# Altium PCB INVERTER_Logic_noCutout.pcbdoc (part 2 of 2)
Units mil, origin at the board's own origin, x right, y up, seen from the top; angles counter-clockwise.
Board outline 4675.98 x 2297.64 mil, 2 copper layers (Top Layer, Bottom Layer), stack 64.567 mil thick; 154 components, 177 nets, 511 pads, 163 vias.
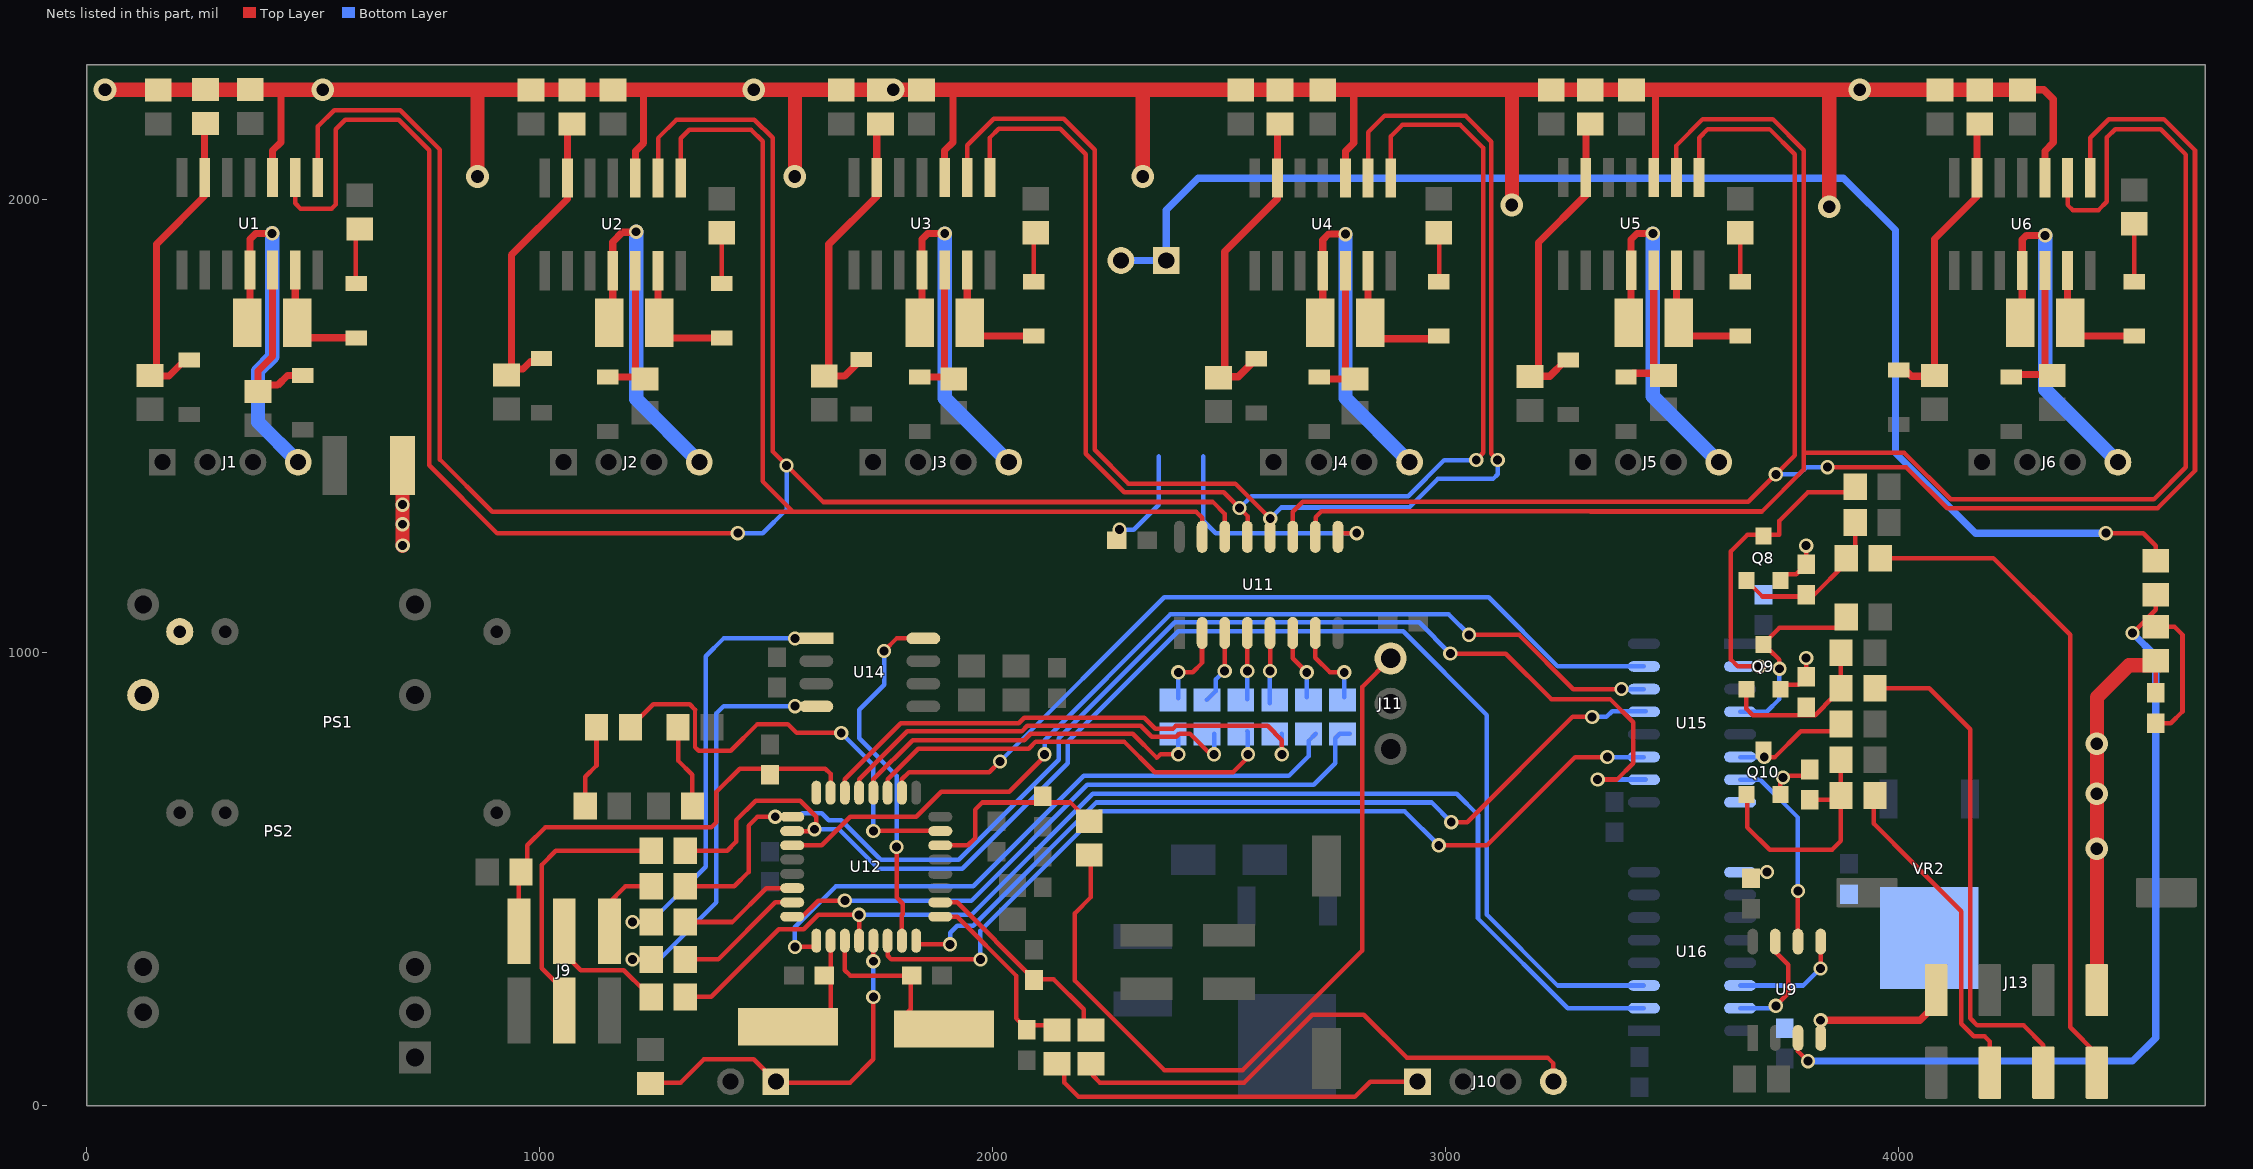
[diagram p2: the nets of this part, all layers, seen from the top]

## Via types
v1: diameter 31.5, hole 19.68, Top Layer to Bottom Layer, 136 vias
v2: diameter 50, hole 28, Top Layer to Bottom Layer, 27 vias

## Nets (pads, with @x,y where several pads share a name; then routed paths per layer and width w, separated by ;. In a path a pad name is that pad's centre, name@x,y a point inside that pad or via, vN(x,y) a via of type N, cw(c..) or ccw(c..) an arc to the next point about the centre after c; other vN are vias at no path point) (continued)
GND_HV: C1.1 C3.1 C5.1 C7.1 C9.1 C11.1 C20.2 C31.1 C59.2 C60.1 C61.1 C62.1 C63.1 C64.1 C65.2 C66.1 J13.1 J13.4 PS1.8 PS2.16 Q8.2 Q9.2 Q10.2 R4.2 R8.2 R12.2 R16.2 R20.2 R24.2 R25.2 R26.2 R27.2 R28.2 R29.2 R30.2 R81.1 U1.3 U2.3 U3.3 U4.3 U5.3 U6.3 U9.4 U11.9 U15.8 U16.9 VR2.4 | length 9035.7
  Top Layer w10: v1(2279.53,1271.65) 2285.43,1265.75 C31.1@2285.43,1236.22 ; U11.9@2761.81,1255.91 2769.69,1263.78 v1(2803.15,1263.78) ; C59.2@3673.23,515.75 v1(3708.66,515.75) ; Q9.2@3736.22,929.13 3777.56,929.13 C61.1@3795.28,946.85 v1(3795.28,988.19) ; Q10.2@3738.19,687.01 3738.19,718.5 3748.03,728.35 C60.1@3811.02,728.35 ; Q8.2@3740.16,1173.23 3773.62,1173.23 C62.1@3795.28,1194.88 v1(3795.28,1236.22) ; U9.4@3827.17,149.61 v1(3827.17,188.58) ; C66.1@4566.93,911.42 R81.1@4566.93,982.28
  Top Layer w15.75: U1.3@410.04,2049.21 410.04,2108.46 428.35,2126.77 428.35,2242.91 ; U2.3@1210.83,2047.64 1210.83,2106.89 1229.13,2125.2 1229.13,2242.91 ; U3.3@1893.5,2049.21 1893.5,2108.46 1911.81,2126.77 1911.81,2242.91 ; U4.3@2778.15,2047.64 2778.15,2106.89 2796.46,2125.2 2796.46,2242.91 ; U5.3@3462.8,2048.82 3462.8,2238.58 ; v1(3827.17,188.58) 4046.85,188.58 J13.1@4078.74,220.47 ; R24.2@4272.83,2242.52 4319.68,2242.52 4340.55,2221.65 4340.55,2125.98 4322.24,2107.68 U6.3@4322.24,2048.43
  Top Layer w31.5: v2@39.37,2242.52 862.2,2242.52 ; v1@696.85,1236.22 C20.2@696.85,1374.02 ; v2(862.2,2051.18) 862.2,2242.52 ; v2(1562.99,2051.18) 1562.99,2240.16 ; v2(2330.71,2051.18) 2330.71,2236.22 ; v2(3145.67,1988.19) 3145.67,2238.58 ; v2(3846.46,1984.25) 3846.46,2242.52 ; R24.2@4272.83,2242.52 862.2,2242.52 ; J13.4@4437.01,255.12 4437.01,901.57 4507.87,972.44 R81.1@4574.8,972.44
  Bottom Layer w10: v1(2279.53,1271.65) 2311.02,1271.65 2366.14,1326.77 2366.14,1433.07 ; 2464.57,1433.07 2464.57,1291.34 2492.13,1263.78 v1(2803.15,1263.78)
  other v1: 3744.09,724.41 697.24,1236.61 696.85,1283.46 696.85,1326.77
  other v2: 4437.01,566.93 4437.01,688.98 4437.01,799.21 40.16,2242.52 520.47,2242.52 1472.44,2242.52 1780.32,2242.52 3913.39,2242.52
H_in_A: 
H_in_B: 
H_in_C: 
H_in_D: 
H_in_E: 
H_in_F: 
H_in_U: U1.1 U2.1 U11.15 | length 4287
  Top Layer w10: U1.1@510.04,2049.21 510.04,2161.61 546.06,2197.64 692.13,2197.64 779.53,2110.24 779.53,1426.3 894.8,1311.02 1818.19,1311.02 ; U2.1@1310.83,2047.64 1310.83,2135.63 1329.92,2154.72 1466.14,2154.72 1492.13,2128.74 1492.13,1377.95 1558.66,1311.42 2448.43,1311.42 2461.81,1298.03 U11.15@2461.81,1255.91
H_in_V: U3.1 U4.1 U11.13 | length 3041.4
  Top Layer w10: U3.1@1993.5,2049.21 1993.5,2137.2 2012.6,2156.3 2148.82,2156.3 2204.72,2100.39 2204.72,1439.32 2290.11,1353.94 2509.84,1353.94 2562.2,1301.57 U11.13@2562.2,1255.91 ; U4.1@2878.15,2047.64 2878.15,2139.57 2903.54,2164.96 3031.89,2164.96 3082.68,2114.17 3082.68,1441.73 3066.93,1425.98 v1(3066.93,1425.2)
  Bottom Layer w10: v1(2544.49,1319.29) 2570.87,1345.67 2916.54,1345.67 2996.06,1425.2 v1(3066.93,1425.2)
H_in_W: U5.1 U6.1 U11.11 | length 4289
  Top Layer w10: U11.11@2662.2,1251.97 2662.2,1311.02 2684.25,1333.07 3667.72,1333.07 3770.08,1435.43 3770.08,2100 3714.17,2155.91 3577.95,2155.91 3558.86,2136.81 U5.1@3558.86,2048.82 ; v1(3842.52,1409.45) 4015.75,1409.45 4106.3,1318.9 4570.87,1318.9 4653.54,1401.57 4653.54,2109.06 4585.04,2177.56 4463.39,2177.56 4422.24,2136.42 U6.1@4422.24,2048.43
  Bottom Layer w10: v1(3728.35,1393.7) 3779.53,1393.7 3795.28,1409.45 v1(3842.52,1409.45)
H_out_A: D2.1 R2.2 U1.12 | length 372.3
  Top Layer w15.75: U1.12@410.04,1844.49 410.04,1654.13 377.95,1622.05 377.95,1594.49 381.89,1590.55 421.26,1590.55 442.91,1612.2 D2.1@476.38,1612.2
H_out_B: D5.1 R6.2 U2.12 | length 305.5
  Top Layer w15.75: D5.1@1149.61,1608.27 R6.2@1210.63,1608.27 ; R6.2@1210.83,1598.43 U2.12@1210.83,1842.91
H_out_C: D8.1 R10.2 U3.12 | length 318.9
  Top Layer w15.75: D8.1@1838.58,1608.27 R10.2@1903.54,1608.27 ; R10.2@1893.5,1590.55 U3.12@1893.5,1844.49
H_out_D: D11.1 R14.2 U4.12 | length 343.3
  Top Layer w15.75: D11.1@2731.89,1615.75 2720.47,1604.33 R14.2@2799.21,1604.33 ; R14.2@2778.15,1594.49 U4.12@2778.15,1842.91
H_out_E: D14.1 R18.2 U5.12 | length 273.4
  Top Layer w15.75: D14.1@3412.6,1616.93 3458.86,1616.93 U5.12@3458.86,1844.09
H_out_F: D17.1 R22.2 U6.12 | length 295.9
  Top Layer w15.75: D17.1@4255.91,1614.17 R22.2@4314.37,1614.17 ; R22.2@4322.24,1606.3 U6.12@4322.24,1843.7
hall_1: J13.8 R88.1 | length 1462.7
  Top Layer w10: R88.1@3976.38,1208.66 4208.66,1208.66 4377.95,1039.37 4377.95,173.23 4437.01,114.17 J13.8@4437.01,72.83
hall_2: J13.7 R85.1 | length 1132.8
  Top Layer w10: R85.1@3946.85,921.26 4066.93,921.26 4157.48,830.71 4157.48,192.91 4173.23,177.17 4275.59,177.17 4318.9,133.86 J13.7@4318.9,72.83
hall_3: J13.6 R83.1 | length 732
  Top Layer w10: R83.1@3944.88,685.04 3944.88,622.05 4031.5,535.43 4137.8,429.13 4137.8,181.1 4165.35,153.54 4188.98,153.54 4200.79,141.73 J13.6@4200.79,72.83
hall_5v: 
hall_gnd: 
Hall_Link1: C62.2 Q8.1 R88.2 R89.2 | length 342.9
  Top Layer w10: Q8.1@3663.39,1159.45 3698.82,1124.02 3809.06,1124.02 R88.2@3883.86,1198.82 ; R88.2@3903.54,1210.63 R89.2@3903.54,1287.4
Hall_Link2: C61.2 Q9.1 R85.2 R86.2 | length 339.8
  Top Layer w10: Q9.1@3663.39,919.29 3663.39,875.98 3677.17,862.2 3814.96,862.2 R85.2@3856.3,903.54 ; R85.2@3872.05,919.29 R86.2@3872.05,1000
Hall_Link3: C60.2 Q10.1 R82.2 R83.2 | length 544.3
  Top Layer w10: Q10.1@3665.35,687.01 3665.35,614.17 3714.57,564.96 3852.36,564.96 3872.05,584.65 R82.2@3872.05,763.78 ; C60.2@3803.15,675.2 R83.2@3860.24,675.2
HV_DIV: C66.2 R80.1 R81.2 U9.3 | length 2175.3
  Top Layer w10: U9.3@3777.17,149.61 3777.17,120.47 v1(3799.21,98.43) ; v1(4515.75,1043.31) 4566.93,1094.49 R80.1@4566.93,1127.95 ; C66.2@4566.93,844.49 4600.39,844.49 4625.98,870.08 4625.98,1039.37 4608.27,1057.09 R81.2@4566.93,1057.09
  Bottom Layer w15.75: v1(3799.21,98.43) 4515.75,98.43 4566.93,149.61 4566.93,992.13 v1(4515.75,1043.31)
HV_NEG: 
HV_POS: J7.1 J7.2 R80.2 | length 3072.5
  Top Layer w10: v1(4456.69,1263.78) 4539.37,1263.78 4566.93,1236.22 R80.2@4566.93,1202.76
  Bottom Layer w15.75: J7.2@2282.68,1865.75 2365.75,1865.75 2382.68,1882.68 2382.68,1977.17 2452.76,2047.24 3877.95,2047.24 3992.13,1933.07 3992.13,1440.94 4169.29,1263.78 v1(4456.69,1263.78)
HV_SHUNT: 
INT0: U12.14 U15.11 | length 2013.6
  Top Layer w10: U12.14@1767.72,364.17 1767.72,330.71 1775.59,322.83 v1(1972.44,322.83) ; v1(2984.25,574.8) 3090.55,574.8 3285.43,769.69 v1(3356.3,769.69)
  Bottom Layer w10: 1972.44,346.46 v1(1972.44,322.83) 1972.44,385.83 2236.22,649.61 2909.45,649.61 v1(2984.25,574.8) ; v1(3356.3,769.69) U15.11@3437.01,769.69
INT0_HV: Q10.3 R84.2 U15.6 | length 236.2
  Top Layer w10: v1(3702.76,769.69) 3726.38,769.69 3783.46,826.77 R84.2@3862.2,826.77
  Bottom Layer w10: U15.6@3649.61,769.69 v1(3702.76,769.69)
INT0_link: 
INT1: U12.16 U15.13 | length 1878.2
  Top Layer w10: U12.16@1826.77,356.3 v1(1905.51,356.3) ; v1(3011.81,625.98) 3047.24,625.98 3279.53,858.27 v1(3322.83,858.27)
  Bottom Layer w10: v1(1905.51,356.3) 1905.51,381.89 1921.26,397.64 1956.69,397.64 2228.35,669.29 2968.5,669.29 v1(3011.81,625.98) ; v1(3322.83,858.27) 3354.33,858.27 3366.93,870.87 U15.13@3440.94,870.87
INT1_HV: Q9.3 R87.2 U15.4 | length 416.3
  Top Layer w10: Q9.3@3704.72,1023.62 3736.22,1055.12 R87.2@3889.76,1055.12 ; Q9.3@3712.6,1007.87 3736.22,984.25 v1(3736.22,964.57)
  Bottom Layer w10: U15.4@3649.61,869.69 3708.27,869.69 3736.22,897.64 v1(3736.22,964.57)
INT1_link: 
INT2: U12.26 U15.15 | length 1896.8
  Top Layer w10: U12.26@1799.21,690.95 1799.21,720.47 1814.96,736.22 1992.13,736.22 v1(2015.75,759.84)
  Bottom Layer w10: v1(2015.75,759.84) 2377.95,1122.05 3094.49,1122.05 3246.85,969.69 U15.15@3437.01,969.69
INT2_HV: Q8.3 R90.2 U15.2 | length 694.6
  Top Layer w10: v1(3691.73,969.69) 3644.49,969.69 3629.25,984.92 3629.25,1223.74 3665.35,1259.84 3736.22,1259.84 3736.22,1291.34 3799.21,1354.33 R90.2@3901.57,1354.33
  Bottom Layer w10: U15.2@3649.61,969.69 v1(3691.73,969.69)
INT2_link: 
L_in_A: 
L_in_B: 
L_in_C: D9.2 R11.1 | length 119.5
  Top Layer w10: D9.2@2090.55,1818.9 2090.55,1913.39 R11.1@2108.27,1931.1
L_in_D: 
L_in_E: 
L_in_F: 
L_in_U: U1.2 U2.2 U11.14 | length 4402.9
  Top Layer w10: U1.2@460.04,2049.21 460.04,1991.93 471.65,1980.31 540.16,1980.31 549.21,1989.37 549.21,2155.51 570.08,2176.38 688.66,2176.38 755.91,2109.14 755.91,1413.39 905.51,1263.78 v1(1437.01,1263.78) ; U2.2@1260.83,2047.64 1260.83,2136.02 1301.57,2176.77 1473.62,2176.77 1513.78,2136.61 1513.78,1444.09 1625.2,1332.68 2485.83,1332.68 2512.2,1306.3 U11.14@2512.2,1255.91
  Bottom Layer w10: v1(1437.01,1263.78) 1492.13,1263.78 1544.49,1316.14 v1(1544.49,1413.39)
L_in_V: U3.2 U4.2 U11.12 | length 3251.4
  Top Layer w10: U3.2@1943.5,2049.21 1943.5,2119.88 2001.97,2178.35 2156.3,2178.35 2224.8,2109.84 2224.8,1447.64 2299.09,1373.35 2534.92,1373.35 v1(2612.2,1296.06) U11.12@2612.2,1255.91 ; U4.2@2828.15,2047.64 2828.15,2148.62 2864.57,2185.04 3043.31,2185.04 3100.16,2128.19 3100.16,1439.21 v1(3114.17,1425.2)
  Bottom Layer w10: v1(2612.2,1296.06) 2636.61,1320.47 2874.49,1320.47 2874.65,1320.63 2919.06,1320.63 2981.89,1383.46 3103.94,1383.46 3114.17,1393.7 v1(3114.17,1425.2)
L_in_W: U5.2 U6.2 U11.10 | length 4768.7
  Top Layer w10: U11.10@2712.2,1251.97 2712.2,1299.21 2724.8,1311.81 3697.64,1311.81 3790.16,1404.33 3790.16,1440.94 ; 3318.79,1311.02 3697.64,1311.02 ; U5.2@3508.86,2048.82 3508.86,2119.49 3567.32,2177.95 3721.65,2177.95 3790.16,2109.45 3790.16,1440.94 ; U6.2@4372.24,2048.43 4372.24,1988.39 4383.46,1977.17 4440.55,1977.17 4459.06,1995.67 4459.06,2137.4 4477.17,2155.51 4577.56,2155.51 4633.46,2099.61 4633.46,1409.06 4562.99,1338.58 4114.17,1338.58 4011.81,1440.94 3790.16,1440.94
L_out_A: D1.1 R1.1 R30.1 U1.6 | length 694.2
  Top Layer w15.75: D1.1@235.04,1644.09 214.57,1644.09 181.1,1610.63 153.54,1610.63 153.54,1901.57 260.04,2008.07 R30.1@260.04,2165.35
L_out_B: D4.1 R5.1 R29.1 U2.6 | length 712.8
  Top Layer w15.75: D4.1@990.55,1642.52 979.13,1642.52 962.6,1625.98 937.01,1625.98 920.08,1609.06 937.01,1609.06 937.01,1877.95 1060.83,2001.77 R29.1@1060.83,2169.29
L_out_C: D7.1 R9.1 R28.1 U3.6 | length 702.5
  Top Layer w15.75: D7.1@1718.5,1644.09 1706.3,1644.09 1672.84,1610.63 1628.35,1610.63 1637.8,1620.08 1637.8,1901.57 1743.5,2007.28 R28.1@1743.5,2161.42
L_out_D: D10.1 R13.1 R25.1 U4.6 | length 691.8
  Top Layer w15.75: D10.1@2581.5,1648.82 2541.73,1609.06 2511.81,1609.06 2511.81,1885.83 2628.15,2002.17 R25.1@2628.15,2166.53
L_out_E: D13.1 R17.1 R26.1 U5.6 | length 687.3
  Top Layer w15.75: D13.1@3283.86,1643.7 3262.6,1643.7 3229.13,1610.24 3204.72,1610.24 3204.72,1905.51 3308.86,2009.65 R26.1@3308.86,2161.42
L_out_F: D16.1 R21.1 R27.1 U6.6 | length 678.9
  Top Layer w15.75: D16.1@4011.81,1625.98 4027.56,1610.24 4090.16,1610.24 4089.76,1609.84 4078.74,1609.84 4078.74,1913.39 4172.24,2006.89 R27.1@4172.24,2153.54
LED1: D21.2@1199.84,835.47 U12.23 | length 1003.9
  Top Layer w7.87: 1342.52,791.34 1342.52,874.02
  Top Layer w10: D21.2@1199.84,835.47 1250.2,885.83 1330.71,885.83 1342.52,874.02 ; 1342.52,791.34 1350.39,783.46 1421.26,783.46 1480.31,842.52 1547.24,842.52 1566.93,822.83 v1(1665.35,822.83) ; v1(1736.22,606.3) 1736.89,606.97 1883.19,606.97 U12.23@1883.86,606.3
  Bottom Layer w10: v1(1665.35,822.83) 1736.22,751.97 1736.22,649.61 v1(1736.22,606.3)
LED_link_1: D21.1@1125.04,835.47 R50.1 | length 184.3
  Top Layer w10: R50.1@1100.39,661.42 1100.39,726.38 1125.04,751.02 D21.1@1125.04,835.47
LED_link_2: D22.1 R62.1 | length 187.1
  Top Layer w10: D22.1@1305.04,835.47 1305.04,761.89 1336.61,730.31 R62.1@1336.61,661.42
LINK_A: D3.2 R3.1 | length 113.8
  Top Layer w10: D3.2@593.31,1819.29 R3.1@593.31,1933.07
LINK_B: D6.2 R7.1 | length 112.2
  Top Layer w10: D6.2@1401.57,1814.96 R7.1@1401.57,1927.16
LINK_C: 
LINK_D: D12.2 R15.1 | length 114.6
  Top Layer w10: D12.2@2985.04,1814.96 R15.1@2985.04,1929.53
LINK_E: D15.2 R19.1 | length 114.6
  Top Layer w10: D15.2@3650,1816.14 R19.1@3650,1930.71
LINK_F: D18.2 R23.1 | length 128
  Top Layer w10: D18.2@4519.69,1818.9 R23.1@4519.69,1946.85
MISO: R64.1 U12.1 U15.10 | length 2925.2
  Top Layer w10: R64.1@1320.87,484.25 1429.13,484.25 1460.63,515.75 1460.63,618.11 1480.31,637.8 U12.1@1557.09,637.8 ; v1(3009.84,998.03) 3131.89,998.03 3232.28,897.64 3362.2,897.64 3413.39,846.46 3413.39,755.91 3377.56,720.08 v1(3335.04,720.08)
  Bottom Layer w10: v1(1519.68,637.8) 1570.87,637.8 1578.74,645.67 1622.05,645.67 1637.8,629.92 1665.35,629.92 1752.64,542.64 1924.53,542.64 2145.67,763.78 2145.67,811.02 2401.57,1066.93 2940.94,1066.93 v1(3009.84,998.03) ; v1(3335.04,720.08) U15.10@3440.94,720.08
MISO_HV: U9.6 U15.7 | length 436.1
  Top Layer w10: U9.6@3777.17,362.2 v1(3777.17,474.02)
  Bottom Layer w10: U15.7@3649.61,719.69 3693.7,719.69 3777.17,636.22 v1(3777.17,474.02)
MISO_link: J9.1 R64.2 | length 112.8
  Top Layer w10: J9.1@1149.61,444.88 1188.98,484.25 R64.2@1246.06,484.25
MOSI: R67.1 U12.2 U16.3 | length 3155.8
  Top Layer w10: R67.1@1320.87,562.99 1413.39,562.99 1433.07,582.68 1433.07,629.92 1476.38,673.23 1574.8,673.23 1610.24,637.8 1610.24,606.3 U12.2@1557.09,606.3
  Bottom Layer w10: v1(1606.3,610.24) 1660.32,610.24 1747.48,523.07 1932.52,523.07 2165.35,755.91 2165.35,803.15 2409.45,1047.24 2905.51,1047.24 3090.55,862.2 3090.55,421.26 3246.46,265.35 U16.3@3437.01,265.35
MOSI_HV: U9.5 U16.14 | length 252
  Top Layer w10: v1(3826.77,303.15) 3827.17,303.54 U9.5@3827.17,362.2
  Bottom Layer w10: U16.14@3649.61,265.35 3788.98,265.35 v1(3826.77,303.15)
MOSI_link: J9.4 R67.2 | length 550.3
  Top Layer w10: J9.4@1051.18,255.91 1003.94,303.15 1003.94,531.5 1035.43,562.99 R67.2@1246.06,562.99
PD7_STB: U12.15 U14.8 | length 797.5
  Top Layer w10: v1(1759.84,1003.94) 1787.4,1031.5 U14.8@1842.52,1031.5 ; v1(1787.4,570.87) 1787.4,459.9 1801.21,446.09 1801.21,422.7 1799.21,420.71 U12.15@1799.21,364.17
  Bottom Layer w10: v1(1759.84,1003.94) 1759.84,929.13 1704.72,874.02 1704.72,811.02 1787.4,728.35 v1(1787.4,570.87)
ph_U: 
ph_U_A: C2.2 J1.4 U1.11 | length 813.1
  Top Layer w15.75: C2.2@360.04,1708.66 360.04,1912.8 372.83,1925.59 v1(409.06,1925.59)
  Bottom Layer w31.5: v1(409.06,1925.59) 409.06,1653.15 377.95,1622.05 377.95,1509.06 J1.4@466.54,1420.47
ph_U_B: C4.2 J2.4 U2.11 | length 809.4
  Top Layer w15.75: C4.2@1160.83,1724.41 1160.83,1906.89 1181.89,1927.95 v1@1212.6,1927.95
  Bottom Layer w31.5: v1(1212.6,1929.13) 1212.6,1559.84 J2.4@1351.97,1420.47
ph_V: 
ph_V_C: C6.2 J3.4 U3.11 | length 795.3
  Top Layer w15.75: C6.2@1843.5,1736.22 1843.5,1912.8 1856.3,1925.59 v1@1893.7,1925.59
  Bottom Layer w31.5: v1(1893.7,1925.2) 1893.7,1561.81 J3.4@2035.04,1420.47
ph_V_D: C8.2 J4.4 U4.11 | length 800.1
  Top Layer w15.75: C8.2@2728.15,1728.35 2728.15,1911.22 2740.94,1924.02 v1@2778.15,1924.02
  Bottom Layer w31.5: v1(2778.15,1923.82) 2778.15,1562.01 J4.4@2919.69,1420.47
ph_V_shunt: 
ph_W: 
ph_W_E: C10.2 J5.4 U5.11 | length 798.3
  Top Layer w15.75: C10.2@3408.86,1732.28 3408.86,1912.4 3421.65,1925.2 v1(3456.69,1925.2)
  Bottom Layer w31.5: v1(3456.69,1925.2) 3456.69,1566.14 J5.4@3602.36,1420.47
ph_W_F: C12.2 J6.4 U6.11 | length 797.5
  Top Layer w15.75: C12.2@4272.24,1736.22 4272.24,1912.01 4281.5,1921.26 v1(4322.83,1921.26)
  Bottom Layer w31.5: v1(4322.83,1921.26) 4322.83,1581.1 J6.4@4483.46,1420.47
ph_W_shunt: 
PSCIN0: U12.32
PSCIN1: U12.3 U15.14 | length 2180.3
  Top Layer w10: U12.3@1557.09,574.8 1622.05,574.8 1685.04,637.8 1830.71,637.8 1885.83,692.91 2035.98,692.91 2114.17,771.1 v1(2114.17,775.59) ; v1(3051.18,1039.37) 3161.42,1039.37 3281.1,919.69 v1(3387.4,919.69)
  Bottom Layer w10: v1(2114.17,775.59) 2114.17,807.08 2391.5,1084.41 3006.14,1084.41 v1(3051.18,1039.37) ; v1(3387.4,919.69) U15.14@3437.01,919.69
PSCOUT0A: R74.1 U12.29 | length 938.8
  Top Layer w10: U12.29@1704.72,690.95 1704.72,720.47 1811.02,826.77 2064.18,826.77 2076.19,838.78 2326.67,838.78 2351.06,814.38 2404.84,814.38 2411.37,820.91 2435,820.91 2480.31,775.59 v1(2488.19,775.59)
  Bottom Layer w10: v1(2488.19,775.59) R74.1@2488.19,820.87
PSCOUT0A_link: R74.2 U11.3 | length 165.4
  Top Layer w10: v1@2511.81,959.65 U11.3@2511.81,1043.31
  Bottom Layer w10: R74.2@2472.44,895.67 2492.13,915.35 2492.13,940.94 2511.61,960.43 v1(2511.61,959.65)
PSCOUT0B: R75.1 U12.28 | length 815.2
  Top Layer w10: U12.28@1736.22,690.95 1736.22,720.47 1822.83,807.09 2069.22,807.09 2083.43,821.3 2308.62,821.3 2362.2,767.72 2370.08,775.59 v1(2409.45,775.59)
  Bottom Layer w10: v1(2409.45,775.59) R75.1@2409.45,820.87
PSCOUT0B_link: R75.2 U11.2 | length 183.6
  Top Layer w10: v1(2409.45,956.69) 2440.94,956.69 2461.61,977.36 U11.2@2461.61,1043.11
  Bottom Layer w10: R75.2@2409.45,899.61 v1(2409.45,956.69)
PSCOUT1A: R72.1 U12.30 | length 1152.9
  Top Layer w10: U12.30@1673.23,690.95 1673.23,720.47 1797.01,844.25 2056.94,844.25 2068.95,856.26 2333.91,856.26 2358.3,831.86 2397.6,831.86 2404.13,838.39 2606.5,838.39 2637.8,807.09 v1(2637.8,775.59)
  Bottom Layer w10: v1(2637.8,775.59) R72.1@2637.8,820.87
PSCOUT1A_link: R72.2 U11.5 | length 154.9
  Top Layer w10: v1@2611.81,959.65 U11.5@2611.81,1043.31
  Bottom Layer w10: R72.2@2611.61,888.39 v1(2611.61,959.65)
PSCOUT1B: R73.1 U12.27 | length 991.4
  Top Layer w10: 2553.74,759.84 2561.61,767.72 2530.12,736.22 2357.17,736.22 2289.57,803.82 2094.6,803.82 2078.86,788.07 1835.31,788.07 1767.72,720.47 ; 1767.72,720.47 U12.27@1767.72,690.95 1767.72,720.47
  Bottom Layer w10: R73.1@2561.61,826.77 2562.99,825.39 v1(2562.99,775.59)
PSCOUT1B_link: R73.2 U11.4 | length 146.3
  Top Layer w10: v1@2561.81,959.65 U11.4@2561.81,1043.31
  Bottom Layer w10: R73.2@2561.61,897.05 v1(2561.61,959.65)
PSCOUT2A: R70.1 U12.8 | length 1429.8
  Top Layer w10: U12.8@1557.09,417.32 1578.74,417.32 1614.17,452.76 v1(1673.23,452.76)
  Bottom Layer w10: v1(1673.23,452.76) 1952.76,452.76 2208.66,708.66 2708.66,708.66 2755.91,755.91 2755.91,811.02 2765.75,820.87 R70.1@2787.4,820.87
PSCOUT2A_link: R70.2 U11.7 | length 186.6
  Top Layer w10: U11.7@2711.81,1043.31 2711.81,988.98 2744.09,956.69 v1(2775.59,956.69)
  Bottom Layer w10: R70.2@2775.59,901.57 v1(2775.59,956.69)
PSCOUT2B: R71.1 U12.9 | length 1450.5
  Top Layer w10: v1(1562.99,350.39) 1610.24,350.39 U12.9@1610.24,364.17
  Bottom Layer w10: v1(1562.99,350.39) 1562.99,393.7 1653.54,484.25 1956.69,484.25 2200.79,728.35 2653.54,728.35 2696.85,771.65 2696.85,805.12 R71.1@2712.6,820.87
PSCOUT2B_link: R71.2 U11.6 | length 154.6
  Top Layer w10: U11.6@2661.81,1043.31 2661.81,987.8 v1(2692.91,956.69)
  Bottom Layer w10: R71.2@2692.91,901.57 v1(2692.91,956.69)
RESET: C32.2 J9.5 R66.2 U12.31 | length 1022.3
  Top Layer w10: J9.5@953.86,385.04 953.86,520.79 972.44,539.37 972.44,574.8 1011.81,614.17 1377.95,614.17 1389.76,625.98 1389.76,692.91 1440.94,744.09 1629.92,744.09 1641.73,732.28 U12.31@1641.73,690.95
retainer: 
RXCAN: R69.2 U14.4 | length 929.7
  Top Layer w10: v1(1204.72,322.83) R69.2@1250,322.83 ; v1(1562.99,881.89) U14.4@1609.84,881.89
  Bottom Layer w10: v1(1204.72,322.83) 1263.78,322.83 1389.76,448.82 1389.76,866.14 1405.51,881.89 v1@1566.22,881.89
RXCAN_link: R69.1 U12.7 | length 288.4
  Top Layer w10: R69.1@1320.87,322.83 1393.7,322.83 1519.69,448.82 U12.7@1557.09,448.82
SCK: R68.1 U12.12 U16.2 | length 2689.1
  Top Layer w10: R68.1@1320.87,240.16 1377.95,240.16 1527.56,389.76 1582.68,389.76 1614.17,421.26 v1(1704.72,421.26) U12.12@1704.72,364.17
  Bottom Layer w10: v1(1704.72,421.26) 1952.76,421.26 2220.47,688.98 3023.62,688.98 3070.87,641.73 3070.87,413.39 3268.9,215.35 U16.2@3437.01,215.35
SCK_HV: U9.7 U16.15 | length 245.9
  Top Layer w10: U9.7@3727.17,362.2 3728.35,361.02 3728.35,338.58 3755.91,311.02 3755.91,248.03 v1(3728.35,220.47)
  Bottom Layer w10: U16.15@3649.61,215.35 3723.23,215.35 v1(3728.35,220.47)
SCK_link: J9.3 R68.2 | length 222.5
  Top Layer w10: J9.3@1047.24,342.52 1090.55,299.21 1185.04,299.21 R68.2@1232.28,251.97
shunt_+5V: 
shunt_b_5v: 
shunt_b_gnd: 
shunt_b_sig: J11.3 R78.2 | length 1805.6
  Top Layer w10: R78.2@2216.54,570.87 2216.54,460.63 2181.1,425.2 2181.1,275.59 2377.95,78.74 2551.18,78.74 2814.96,342.52 2814.96,924.41 J11.3@2877.95,987.4
shunt_dc_adc: C56.1 R78.1 U12.22 | length 421.9
  Top Layer w10: U12.22@1883.86,574.8 1944.88,574.8 1960.63,590.55 1960.63,653.54 1976.38,669.29 2171.26,669.29 R78.1@2212.6,627.95
shunt_gnd: 
shunt_series_V: 
shunt_series_W: 
shunt_sig_link: 
shunt_sig_V: J10.1 R76.2 | length 854.1
  Top Layer w10: R76.2@2157.48,98.43 2157.48,51.18 2188.98,19.68 2799.21,19.68 2832.68,53.15 J10.1@2937.4,53.15
shunt_sig_W: J10.4 R77.2 | length 1213.4
  Top Layer w10: R77.2@2220.47,110.24 2220.47,66.93 2236.22,51.18 2555.12,51.18 2704.72,200.79 2818.9,200.79 2913.39,106.3 3224.41,106.3 3237.4,93.31 J10.4@3237.4,53.15
shunt_v_adc: C55.1 R76.1 U12.17 | length 416.6
  Top Layer w10: U12.17@1883.86,417.32 1921.26,417.32 2051.18,287.4 2051.18,192.91 2066.93,177.17 R76.1@2145.67,177.17
shunt_w_adc: C54.2 R77.1 U12.18 | length 462
  Top Layer w10: U12.18@1883.86,448.82 1921.26,448.82 2090.55,279.53 2133.86,279.53 2200.79,212.6 R77.1@2200.79,165.35
SS1: 
SS2: 
STB: 
SW1: 
SW2: 
temp_a: J8.1 R63.1 U12.13 | length 803.3
  Top Layer w10: R63.1@1251.97,51.18 1311.02,51.18 1362.2,102.36 1472.44,102.36 1523.62,51.18 1685.04,51.18 1736.22,102.36 v1(1736.22,240.16) ; v1(1736.22,318.9) U12.13@1736.22,365.63
  Bottom Layer w10: v1(1736.22,240.16) v1@1736.22,311.02
temp_b: 
temp_gnd: 
temp_sig: 
TXCAN: R65.2 U14.1 | length 982.2
  Top Layer w10: v1(1204.72,405.51) R65.2@1250,405.51 ; v1(1562.99,1031.5) U14.1@1610.24,1031.5
  Bottom Layer w10: v1(1204.72,405.51) 1244.09,405.51 1366.14,527.56 1366.14,992.13 1405.51,1031.5 v1(1562.99,1031.5)
TXCAN_link: R65.1 U12.6 | length 267.2
  Top Layer w10: R65.1@1320.87,405.51 1425.2,405.51 1500,480.32 U12.6@1557.09,480.32
V_FB: 
VBS_A: C2.1 D3.1 U1.13 | length 246.1
  Top Layer w15.75: C2.1@460.04,1732.28 U1.13@460.04,1844.49 ; C2.1@460.63,1695.28 D3.1@594.49,1695.28
VBS_B: C4.1 D6.1 U2.13 | length 285.9
  Top Layer w15.75: U2.13@1260.83,1842.91 1260.83,1699.8 1265.75,1694.88 D6.1@1401.57,1694.88
VBS_C: C6.1 D9.1 U3.13 | length 195.1
  Top Layer w15.75: C6.1@1943.5,1781.3 U3.13@1943.5,1844.49 ; C6.1@1958.66,1698.82 D9.1@2090.55,1698.82
VBS_D: C8.1 D12.1 U4.13 | length 204.9
  Top Layer w15.75: C8.1@2828.15,1779.72 U4.13@2828.15,1842.91 ; C8.1@2842.52,1692.91 D12.1@2984.25,1692.91
VBS_E: C10.1 D15.1 U5.13 | length 284
  Top Layer w15.75: U5.13@3508.86,1844.09 3508.86,1699.8 C10.1@3515.75,1692.91 ; C10.1@3515.75,1698.82 D15.1@3645.67,1698.82
VBS_F: C12.1 D18.1 U6.13 | length 287.8
  Top Layer w15.75: U6.13@4372.24,1843.7 4372.24,1706.5 4379.92,1698.82 D18.1@4519.69,1698.82
XTAL1: C28.2 U12.10 Y1.1 | length 175.2
  Top Layer w10: Y1.1@1641.73,188.98 U12.10@1641.73,364.17
XTAL2: C48.1 U12.11 Y1.2 | length 323.7
  Top Layer w10: U12.11@1673.23,364.17 1673.23,299.21 1685.04,287.4 1818.9,287.4 1818.9,212.6 Y1.2@1795.28,188.98
pads on no net: J12. J13. J13.3 PS1.7 PS1.10 PS2.1 PS2.9 PS2.11 U1.8 U1.9 U1.10 U1.14 U2.8 U2.9 U2.10 U2.14 U3.8 U3.9 U3.10 U3.14 U4.8 U4.9 U4.10 U4.14 U5.8 U5.9 U5.10 U5.14 U6.8 U6.9 U6.10 U6.14 U12.24 U15.3 U15.5 U15.12 U16.5 U16.6 U16.7 U16.10 U16.11 U16.12

## Polygon pours and split planes (outlines as drawn)
GND_GLV on Bottom Layer "Bottom GLV GND" (solid, remove dead copper, pour order 12): 842.52,11.81 1488.19,11.81 3519.69,11.81 3519.69,1125.98 3464.57,1125.98 2830.71,1125.98 850.39,1125.98 850.39,484.25 850.39,732.28 602.36,484.25 23.62,484.25 23.62,11.81
GND_HV on Bottom Layer "Top Layer-No Net 1" (solid, remove dead copper, pour order 2): 11.81,570.87 566.93,570.87 763.78,767.72 763.78,1216.54 3622.05,1216.54 3622.05,11.81 4661.42,11.81 4661.42,2283.46 11.81,2283.46

## Silkscreen, mask and mechanical layers (free items; w line width, h text height)
Top Overlay:
  lines w7.87: 2940.94,145.67 3019.69,145.67 ; 2940.94,488.19 3019.69,488.19 ; 3059.06,145.67 3137.8,145.67 ; 3059.06,488.19 3137.8,488.19 ; 3177.17,145.67 3255.91,145.67 ; 3177.17,488.19 3255.91,488.19 ; 3299.21,488.19 3377.95,488.19 ; 3421.26,145.67 3500,145.67 ; 3421.26,488.19 3500,488.19 ; 3547.24,149.61 3547.24,228.35 ; 3547.24,271.65 3547.24,350.39 ; 3547.24,401.57 3547.24,480.31 ; 3992.13,661.42 3992.13,740.16 ; 3992.13,779.53 3992.13,858.27 ; 3992.13,897.64 3992.13,976.38 ; 3992.13,1019.69 3992.13,1098.43 ; 4027.56,1220.47 4106.3,1220.47 ; 4157.48,1220.47 4236.22,1220.47 ; 4287.4,1220.47 4366.14,1220.47 ; 4409.45,1220.47 4488.19,1220.47 ; 4523.62,661.42 4523.62,740.16 ; 4523.62,779.53 4523.62,858.27 ; 4523.62,897.64 4523.62,976.38 ; 4523.62,1019.69 4523.62,1098.43 ; 4523.62,1141.73 4523.62,1220.47
  lines w10: 1087.44,805.47 1087.44,860.47 ; 1144.84,875.47 1174.84,905.47 1204.84,875.47 ; 1267.44,805.47 1267.44,860.47 ; 1314.84,875.47 1344.84,905.47 1374.84,875.47 ; 1062.44,785.47 1432.44,785.47 1432.44,1118.11 1062.44,1118.11 1062.44,785.47 ; 1417.32,97.52 2029.8,97.52 2029.8,247.13 1417.32,247.13 1417.32,97.52
  lines w15.75: 1141.73,496.06 1169.29,496.06 1169.29,511.81 1141.73,511.81 1141.73,496.06 ; 1141.73,496.06 1141.73,496.06
  lines w78.74: 43.31,527.56 582.68,527.56 807.09,751.97 807.09,1172.68 3566.93,1172.68 3566.93,43.31 3566.93,1169.29
  text "HV" at 2294.49,1734.25 h47.24
  text "QUTMS Inverter Driver v3.5" at 822.83,1240.16 h59.06
  text "GLV Boundary" at 3066.93,1066.93 h47.24
  text "Power" at 1367.44,920.47 h47.24 r90
  text "Status" at 1196.85,917.32 h47.24 r90
  text "Encoder/ Temp" at 4661.42,787.4 h47.24 r90
  text "Control" at 2448.82,629.92 h47.24
Bottom Overlay:
  lines w78.74: 43.31,527.56 582.68,527.56 806.38,751.26 806.38,1173.23 2862.2,1173.23 ; 2240.16,1173.23 3566.93,1173.23 3566.93,43.31
Mechanical 1:
  the board outline again, w10